# EAGLE board apex-alpha-ii-cr123a-version (EAGLE 6.3)

Size 19.23 x 60.45 mm. Coordinates in mm from the lower left corner, seen from the top.
Outline: 0,0 19.23,0 19.23,60.45 0,60.45 0,0
Copper layers (1*16): Top 0.035mm / dielectric 1.5mm / Bottom 0.035mm
Design rules "default": minimum track width 10mil, minimum drill 24mil, track to track 8mil, track to pad 8mil, pad to pad 8mil, via to via 8mil, smd to smd 8mil, copper to edge 40mil, drill to drill 8mil, minimum pad ring 10mil, minimum via ring 8mil, stop-mask expansion 4mil, vias tented up to drill 0mil, thermal gap 10mil

## Footprints (pad centres in the part's own frame; a part is rotated, then mirrored left to right if it is on the bottom)
0402-CAP = smd 0.7 x 0.9: 1 -0.65,0; 2 0.65,0
SMD-BATTERY-HOLDER-CR123A = smd 7.62 x 6.35: +V -22.377,0; GND 22.377,0 | hole 2: -18.847,8.103
2450BM15A0002 = smd 0.35 x 1: 1 -0.65,-0.875; 2 0,-0.875; 3 0.65,-0.875; 4 0.65,0.875; 5 0,0.875; 6 -0.65,0.875
UBLOX_MAX-6 = smd 1.8 x 0.7: 1_GND 4.95,-4.4; 9_V_RESET 4.95,4.3; 10_GND -4.55,4.3; 18_RESERVED -4.55,-4.4 | smd 1.8 x 0.8: 2_TXD1 4.95,-3.35; 3_RXD1 4.95,-2.25; 4_TIMEPULSE 4.95,-1.15; 5_EXTINT0 4.95,-0.05; 6_V_BCKP 4.95,1.05; 7_VCC_IO 4.95,2.15; 8_VCC 4.95,3.25; 11_RF_IN -4.55,3.25; 12_GND -4.55,2.15; 13_ANTON -4.55,1.05; 14_VCC_RF -4.55,-0.05; 15_RESERVED -4.55,-1.15; 16_SDA2 -4.55,-2.25; 17_SCL2 -4.55,-3.35
RGZ48 = smd 0.7 x 0.3: 1 -3.35,2.75; 2 -3.35,2.25; 3 -3.35,1.75; 4 -3.35,1.25; 5 -3.35,0.75; 6 -3.35,0.25; 7 -3.35,-0.25; 8 -3.35,-0.75; 9 -3.35,-1.25; 10 -3.35,-1.75; 11 -3.35,-2.25; 12 -3.35,-2.75; 25 3.35,-2.75; 26 3.35,-2.25; 27 3.35,-1.75; 28 3.35,-1.25; 29 3.35,-0.75; 30 3.35,-0.25; 31 3.35,0.25; 32 3.35,0.75; 33 3.35,1.25; 34 3.35,1.75; 35 3.35,2.25; 36 3.35,2.75 | smd 0.3 x 0.7: 13 -2.75,-3.35; 14 -2.25,-3.35; 15 -1.75,-3.35; 16 -1.25,-3.35; 17 -0.75,-3.35; 18 -0.25,-3.35; 19 0.25,-3.35; 20 0.75,-3.35; 21 1.25,-3.35; 22 1.75,-3.35; 23 2.25,-3.35; 24 2.75,-3.35; 37 2.75,3.35; 38 2.25,3.35; 39 1.75,3.35; 40 1.25,3.35; 41 0.75,3.35; 42 0.25,3.35; 43 -0.25,3.35; 44 -0.75,3.35; 45 -1.25,3.35; 46 -1.75,3.35; 47 -2.25,3.35; 48 -2.75,3.35 | smd 5.2 x 5.2: TP 0,0
R0402 = smd 0.7 x 0.9: 1 -0.65,0; 2 0.65,0
B2,54 = smd 2.54 x 2.54: TP 0,0
JTI_ANTENNA-1575AT43A40 = smd 1 x 2: FEED -3.81,-1.27; NC 3.29,-1.27
R0603 = smd 1 x 1.1: 1 -0.85,0; 2 0.85,0
CHIPLED_0805 = smd 1.2 x 1.2: A 0,-1.05; C 0,1.05
SC70-5L = smd 0.35 x 0.8: 1 -0.65,-0.85; 2 0,-0.85; 3 0.65,-0.85; 4 0.65,0.85; 5 -0.65,0.85
J502-ND-142-0701-801/806 = smd 5.08 x 2.286: 1 2.565,0; G@1 2.565,5.055; G@2 2.565,-5.055 | smd 5.08 x 2.286 bottom: G@3 2.565,5.055; G@4 2.565,-5.055
CRYSTAL-SMD-5X3 = smd 1.9 x 1.1: 1 -1.85,-1.15; 2 1.85,-1.15; 3 1.85,1.15; 4 -1.85,1.15

## Placement (x,y rotation side)
C2  1uF  [0402-CAP]  46.74,69.34 270 top  (outside the outline)
C3  1uF  [0402-CAP]  42.16,69.34 90 top  (outside the outline)
C4  2.2nF  [0402-CAP]  -41.91,48.26 0 top  (outside the outline)
C5  100nF  [0402-CAP]  -45.72,48.26 0 top  (outside the outline)
C7  470nF  [0402-CAP]  -53.34,48.26 0 top  (outside the outline)
C8  100nF  [0402-CAP]  -57.15,48.26 0 top  (outside the outline)
C9  10uF  [0402-CAP]  -15.24,52.07 0 top  (outside the outline)
C10  10uF  [0402-CAP]  -19.05,52.07 0 top  (outside the outline)
C11  100nF  [0402-CAP]  -22.86,52.07 0 top  (outside the outline)
C12  100nF  [0402-CAP]  -26.67,52.07 0 top  (outside the outline)
C13  100nF  [0402-CAP]  -30.48,52.07 0 top  (outside the outline)
C14  2pF  [0402-CAP]  -34.29,52.07 0 top  (outside the outline)
C15  2pF  [0402-CAP]  -38.1,52.07 0 top  (outside the outline)
C16  27pF  [0402-CAP]  -41.91,52.07 0 top  (outside the outline)
C17  27pF  [0402-CAP]  -45.72,52.07 0 top  (outside the outline)
C18  100nF  [0402-CAP]  -49.53,52.07 0 top  (outside the outline)
CR123A  [SMD-BATTERY-HOLDER-CR123A]  9.65,26.42 90 bottom
F1  0433BM15A0001  [2450BM15A0002]  56.64,33.53 90 top  (outside the outline)
GPS  UBLOX_MAX-6  [UBLOX_MAX-6]  12.7,37.85 270 top
IC1  CC430F5135  [RGZ48]  57.4,40.39 270 top  (outside the outline)
JP1  APEXHAB-LOGO_APEXHAB-SMALL  [APEXHAB-LOGO-SMALL]  -20.83,13.21 0 top  (outside the outline)
R3  56k  [R0402]  -53.34,43.18 0 top  (outside the outline)
R4  47k  [R0402]  -58.42,43.18 0 top  (outside the outline)
TP1  PTR1B2,54  [B2,54]  -16.51,41.91 0 top  (outside the outline)
TP2  PTR1B2,54  [B2,54]  -21.59,41.91 0 top  (outside the outline)
U$1  JTI_ANTENNA-1575AT43A40  [JTI_ANTENNA-1575AT43A40]  14.48,56.13 90 top
U$2  EXC3BB601H  [R0603]  -35.56,43.18 0 top  (outside the outline)
U$3  STATUS  [CHIPLED_0805]  -39.37,30.48 0 top  (outside the outline)
VREG  TLV70019  [SC70-5L]  9.14,26.92 270 top
X2  [J502-ND-142-0701-801/806]  9.65,0 90 top
Y1  26MHz  [CRYSTAL-SMD-5X3]  -55.88,31.75 0 top  (outside the outline)

## Library data of the parts
C2-C5 C7-C18 CR123A JP1 R3 R4 U$2 U$3 = apex
F1 = johanson-technology
GPS U$1 = Ava
IC1 = TI_MSP430_v16
TP1 TP2 = testpad
VREG = !danielparts
X2 = !danielparts; MF: JOHNSON COMPONENTS; MPN: 142-0701-801; OC_FARNELL: 1608592; OC_NEWARK: 90F2624
Y1 = SparkFun

## Nets
GND: C2.1 C3.2 C4.2 C5.2 C7.1 C8.2 C9.2 C10.2 C11.2 C12.2 C13.2 C14.2 C15.2 C16.2 C17.1 C18.2 CR123A.GND F1.2 F1.5 F1.6 GPS.1_GND GPS.6_V_BCKP GPS.10_GND GPS.12_GND IC1.42 IC1.TP R3.1 U$3.C VREG.2 X2.G@1 X2.G@2 X2.G@3 X2.G@4
GPSRX: GPS.3_RXD1 IC1.5
GPSTX: GPS.2_TXD1 IC1.6
N$2: F1.3 IC1.30
N$3: C2.2 CR123A.+V VREG.1 VREG.3
N$6: F1.4 IC1.29
N$7: F1.1 X2.1
N$8: GPS.11_RF_IN U$1.FEED
N$9: IC1.33 R3.2
N$10: C7.2 IC1.7
N$11: C4.1 IC1.40 R4.1 TP1.TP
N$12: IC1.39 TP2.TP
N$13: C17.2 IC1.25 Y1.1
N$14: C16.1 IC1.26 Y1.3
N$15: IC1.1 U$3.A
VCC: C3.1 C5.1 C8.1 C9.1 C10.1 C11.1 C12.1 C13.1 C14.1 C15.1 C18.1 GPS.7_VCC_IO GPS.8_VCC GPS.9_V_RESET IC1.8 IC1.22 IC1.27 IC1.28 IC1.31 IC1.32 IC1.34 IC1.41 IC1.45 R4.2 U$2.1 U$2.2 VREG.5

## Tracks (layer width: path | path; a pad name or v marks a point on that pad's centre or on a via)
GND  (32 unrouted)
GPSRX  (1 unrouted)
GPSTX  (1 unrouted)
N$2  (1 unrouted)
N$3  (3 unrouted)
N$6  (1 unrouted)
N$7  (1 unrouted)
N$8  (1 unrouted)
N$9  (1 unrouted)
N$10  (1 unrouted)
N$11  (3 unrouted)
N$12  (1 unrouted)
N$13  (2 unrouted)
N$14  (2 unrouted)
N$15  (1 unrouted)
VCC  (26 unrouted)